# Altium PCB demo_board.PcbDoc (part 2 of 2)
Units mm, origin at the board's own origin, x right, y up, seen from the top; angles counter-clockwise.
Board outline 152.4 x 101.6 mm, 4 copper layers (L1, L2, L3, L4), stack 1.641 mm thick; 94 components, 72 nets, 715 pads, 204 vias.
Unrouted connection lines stored in the file: 201.
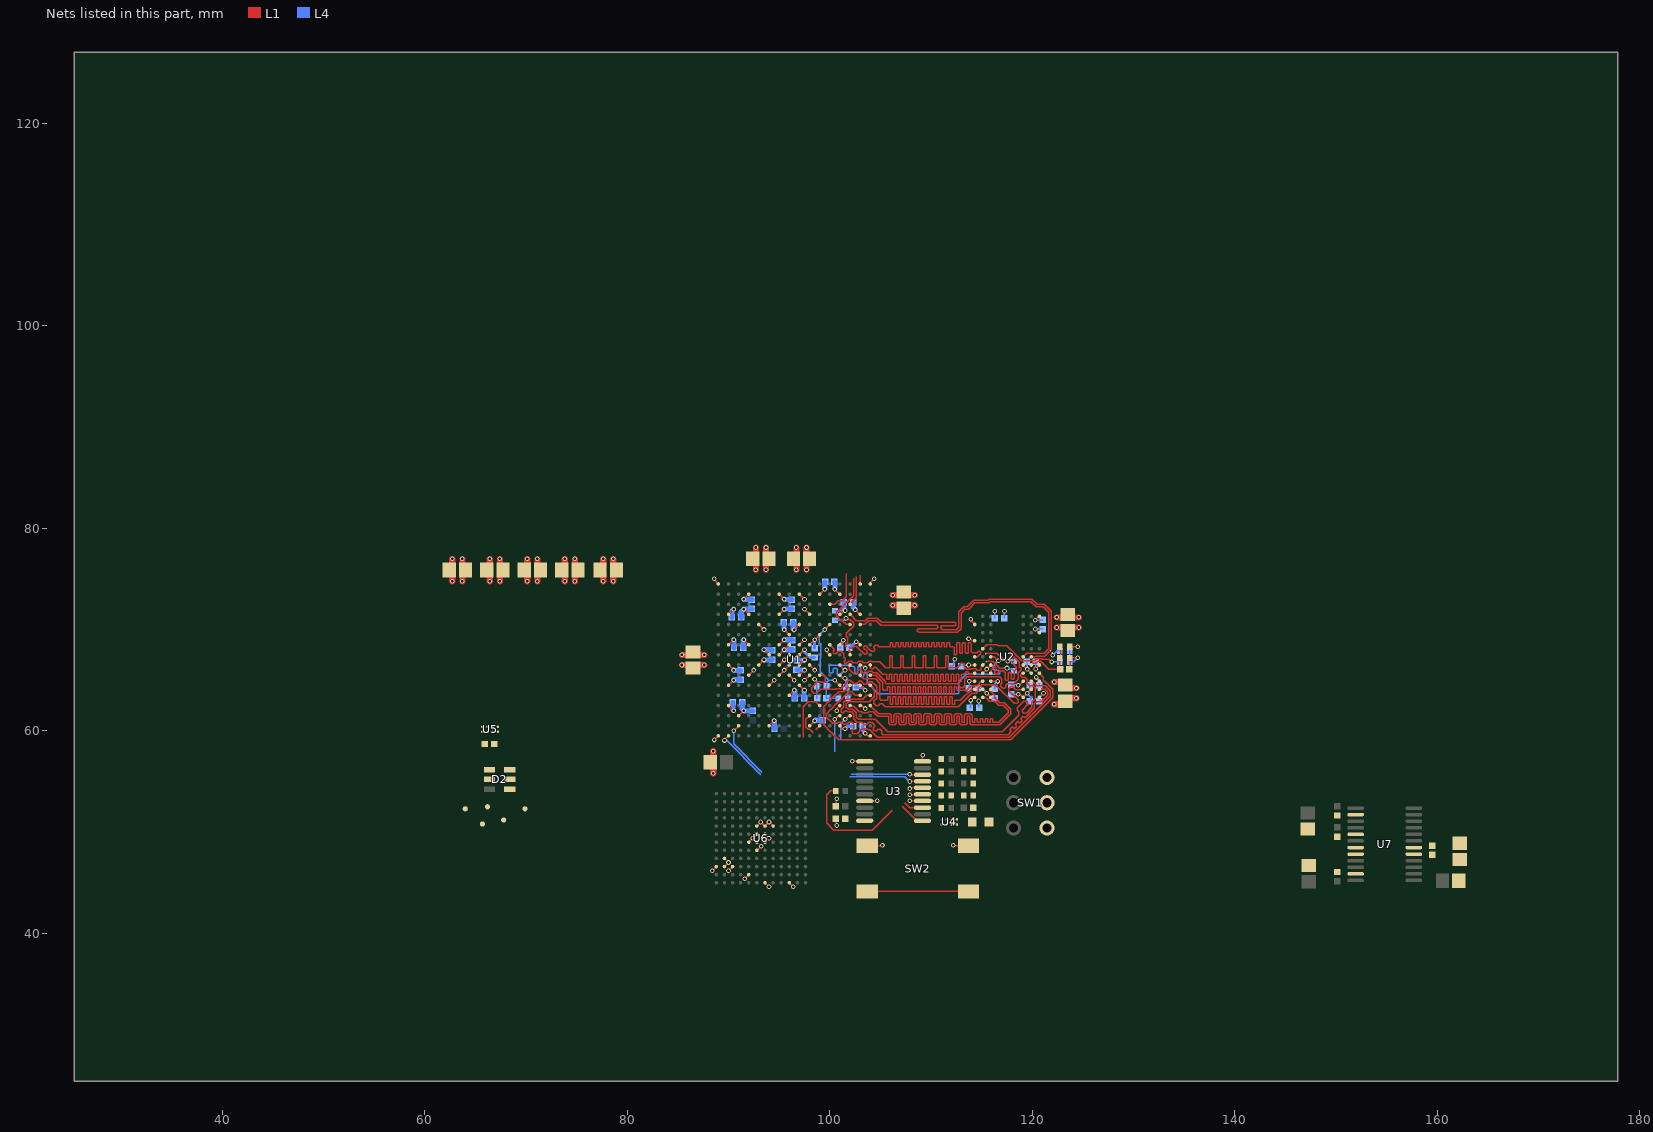
[diagram p4: the nets of this part, all layers, seen from the top]

## Via types
v1: diameter 0.457, hole 0.254, L1 to L4, 204 vias

## Nets (pads, with @x,y where several pads share a name; then routed paths per layer and width w, separated by ;. In a path a pad name is that pad's centre, name@x,y a point inside that pad or via, vN(x,y) a via of type N, cw(c..) or ccw(c..) an arc to the next point about the centre after c; other vN are vias at no path point) (continued)
CK_P: NT1.2 U1.G12 U2.E8 | length 32.6
  L1 w0.127: U1.G12@100,68.5 100.437,68.062 100.437,67.937 100.325,67.825 100.325,67.7 100.4,67.625 100.585,67.625 100.825,67.865 101.151,67.865 101.366,67.651 101.366,67.258 101.525,67.099 101.525,66.95 101.422,66.847 101.422,66.726 101.498,66.65 101.633,66.65 101.849,66.865 102.151,66.865 102.271,66.746 102.729,66.746 102.849,66.865 103.151,66.865 103.263,66.754 103.305,66.754 103.313,66.746 103.729,66.746 103.849,66.865 104.151,66.865 104.19,66.827 104.922,66.827 105.507,66.242 105.905,66.242 105.929,66.266 105.929,67.4 ; 105.929,67.405 106.175,67.405 106.175,66.271 106.204,66.242 107,66.242 ; 107.005,66.242 107.029,66.266 107.029,67.4 ; 107.029,67.405 107.275,67.405 107.275,66.271 107.304,66.242 108.1,66.242 108.129,66.271 108.129,67.405 ; 108.129,67.41 108.375,67.41 108.375,66.277 108.409,66.242 109.195,66.242 109.229,66.277 109.229,67.41 ; 109.229,67.416 109.475,67.416 109.475,66.282 109.514,66.242 110.29,66.242 110.329,66.282 110.329,67.416 ; 110.329,67.421 110.575,67.421 110.575,66.325 110.658,66.242 111.384,66.242 111.429,66.287 111.429,67.421 ; 111.429,67.426 111.675,67.426 111.675,66.292 111.725,66.242 112.58,66.242 112.854,66.516 112.854,66.55 112.969,66.665 113.141,66.665 113.281,66.525 113.281,66.326 113.526,66.081 113.906,66.081 113.955,66.13 114.394,66.13 114.549,65.975 114.851,65.975 114.947,66.071 114.947,66.347 U2.E8@115.1,66.5 115.116,66.5 NT1.2@115.252,66.636
CKE: NT4.2 U1.D14 U2.F2 | length 32.5
  L1 w0.127: U1.D14@102,71.5 102.625,70.875 103.481,70.875 103.725,71.119 104.692,71.119 105.111,70.7 112.325,70.7 112.425,70.6 112.425,70.45 112.35,70.375 111.075,70.375 110.95,70.25 110.95,70.125 111.109,69.966 112.48,69.966 112.719,70.205 112.719,71.737 113.244,72.262 113.592,72.262 114.211,72.881 115.609,72.881 115.734,73.006 119.964,73.006 120.48,72.49 121.185,72.49 121.85,71.825 121.85,67.991 121.205,67.346 121.096,67.346 121.064,67.379 120.336,67.379 120.258,67.3 U2.F2@119.9,67.3
CS: R7.1 U2.G8 | length 8.7
  L1 w0.127: U2.G8@115.1,68.1 115.5,68.5 115.519,68.481 116.519,68.481 116.6,68.4 117.484,68.4 118.729,67.155 118.729,67.147 118.947,66.93 120.246,66.93 120.441,67.125 120.959,67.125 120.991,67.092 121.608,67.092 v1(121.9,66.8)
  L4 w0.127: v1(121.9,66.8) R7.1@122.725,66.8
DM/RDQS: U1.K11 U2.B3 | length 32.5
  L1 w0.127: U1.K11@99,65.5 99.4,65.5 99.55,65.35 99.55,64.85 99.5,64.8 99.217,64.8 99.151,64.865 98.849,64.865 98.669,64.686 98.635,64.686 98.366,64.417 98.366,64.349 98.2,64.183 98.2,63.9 98.4,63.7 98.683,63.7 99.083,64.1 100.6,64.1 100.634,64.134 101.151,64.134 101.55,64.533 101.55,64.65 101.875,64.975 102.042,64.975 102.392,64.625 102.608,64.625 102.933,64.95 103.067,64.95 103.417,64.6 103.583,64.6 103.849,64.865 104.151,64.865 104.619,64.397 104.619,63.219 104.35,62.95 104.35,62.725 104.575,62.5 104.8,62.5 104.975,62.675 105.2,62.675 105.495,62.38 112.68,62.38 114.03,63.73 114.453,63.73 114.67,63.947 114.67,64.194 115.006,64.53 116.328,64.53 116.44,64.417 116.482,64.417 118.199,62.7 118.475,62.7 118.6,62.825 118.6,63.05 117.675,63.975 117.675,64.175 117.85,64.35 118.075,64.35 118.35,64.075 119.075,64.075 U2.B3@119.1,64.1
DQ0: U1.L14 U2.D1 | length 33.3
  L1 w0.127: U1.L14@102,64.5 101.38,63.88 100.864,63.88 100.366,63.382 100.366,63.349 99.882,62.866 99.849,62.866 99.381,62.397 99.381,60.603 100.118,59.866 100.151,59.866 100.366,59.651 100.366,59.618 100.866,59.117 117.871,59.117 122.027,63.273 122.027,64.084 121.484,64.627 121.473,64.627 121.1,65 121.1,65.3 U2.D1@120.7,65.7
DQ1: U1.L16 U2.D3 | length 32.8
  L1 w0.127: U1.L16@104,64.5 104.079,64.421 104.046,64.388 104.365,64.069 104.365,63.349 103.882,62.866 101.849,62.866 101.634,62.651 101.634,62.349 101.864,62.12 102.257,62.12 102.276,62.1 102.3,62.1 102.634,61.766 102.634,61.349 102.864,61.12 104.48,61.12 105.7,59.9 117.024,59.9 118.65,61.526 118.65,61.9 118.525,62.025 118.525,62.275 119.175,62.925 119.425,62.925 119.55,62.8 119.55,62.6 119,62.05 119,61.876 119.134,61.742 119.383,61.742 119.95,62.309 119.95,62.826 120.27,63.147 120.27,64.253 120.053,64.471 119.729,64.471 119.5,64.7 119.5,65.024 119.249,65.275 118.975,65.275 118.85,65.4 118.85,65.55 119,65.7 U2.D3@119.1,65.7
DQ2: U1.M15 U2.C2 | length 33.6
  L1 w0.127: U1.M15@103,63.5 102.517,63.5 102.151,63.866 101.849,63.866 101.366,63.382 101.366,63.349 100.882,62.866 100.849,62.866 100.366,62.382 100.366,62.349 100.151,62.135 100.118,62.135 99.635,61.651 99.635,61.349 99.849,61.135 99.882,61.135 100.283,60.734 100.717,60.734 100.849,60.866 101.151,60.866 101.367,60.65 101.633,60.65 101.849,60.866 102.151,60.866 102.366,60.651 102.366,60.24 102.2,60.075 102.2,59.817 102.308,59.708 102.692,59.708 103.118,60.135 103.244,60.135 103.306,60.197 103.654,60.197 103.731,60.12 103.921,60.12 104.67,59.371 117.73,59.371 121.773,63.414 121.773,63.979 121.379,64.373 121.368,64.373 121.27,64.471 120.413,64.471 119.983,64.9 U2.C2@119.9,64.9
DQ3: U1.M16 U2.B1 | length 31.4
  L1 w0.127: U1.M16@104,63.5 103.625,63.5 103.245,63.12 101.62,63.12 101.366,62.866 101.366,62.349 101.125,62.108 101.125,61.892 101.242,61.775 101.35,61.775 101.55,61.975 101.649,61.975 101.758,61.866 102.151,61.866 102.366,61.651 102.366,61.175 102.675,60.866 103.151,60.866 103.417,60.6 103.583,60.6 103.849,60.866 104.151,60.866 104.45,60.567 104.45,60.433 104.3,60.283 104.3,60.1 104.4,60 104.625,60 104.8,60.175 104.977,60.175 105.125,60.027 105.125,59.75 105.25,59.625 117.625,59.625 117.935,59.935 117.755,60.114 118.025,60.384 118.204,60.204 118.474,60.474 118.294,60.653 118.563,60.923 118.743,60.743 119.012,61.012 118.833,61.192 119.102,61.461 119.282,61.282 120.213,62.212 120.213,62.653 120.422,62.862 120.862,62.862 121.519,63.519 121.519,63.874 121.274,64.119 120.719,64.119 U2.B1@120.7,64.1
DQ4: U1.J14 U2.D7 | length 32.5
  L1 w0.127: U1.J14@102,66.5 101.919,66.419 101.919,66.1 102.221,65.798 102.221,65.796 102.367,65.65 102.6,65.65 102.7,65.75 102.7,65.952 102.773,66.025 103.025,66.025 103.425,65.625 103.608,65.625 103.858,65.875 104.142,65.875 104.263,65.754 104.624,65.754 105.462,64.916 105.462,64.713 105.55,64.625 105.553,64.628 111.475,64.628 112.64,64.628 112.8,64.468 112.8,64.379 112.925,64.254 113.129,64.254 113.35,64.475 113.35,65.143 113.401,65.194 113.537,65.33 116.77,65.33 116.994,65.106 116.994,64.701 116.879,64.586 116.879,64.379 117.058,64.2 117.25,64.2 117.375,64.325 117.375,64.525 117.5,64.65 118.146,64.65 118.596,65.1 118.596,65.72 118.9,66.024 118.9,66.176 118.729,66.347 118.729,66.771 118.025,67.475 117.9,67.475 117.825,67.4 117.825,67.275 118,67.1 118,66.7 118.4,66.3 118.4,66.063 118.237,65.9 118.237,65.187 118.125,65.075 118.025,65.075 117.925,65.175 117.925,65.675 117.825,65.775 117.7,65.775 117.625,65.7 117.625,65.05 117.55,64.975 117.375,64.975 117.325,65.025 117.325,65.75 117.129,65.946 116.8,65.946 116.65,65.796 116.65,65.675 116.575,65.6 116.4,65.6 116.3,65.7 116.3,65.9 116.391,65.991 116.391,66.216 116.332,66.276 116.199,66.276 115.919,65.995 115.919,65.7 U2.D7@115.9,65.7
DQ5: U1.J16 U2.D9 | length 32.5
  L1 w0.127: U1.J16@104,66.5 104,66.229 104.1,66.129 104.247,66.129 104.418,66.3 104.551,66.3 105.243,65.607 105.624,65.607 105.624,65.112 105.878,65.112 105.878,65.607 106.132,65.607 106.132,64.882 106.386,64.882 106.386,65.607 106.64,65.607 106.64,64.882 106.894,64.882 106.894,65.607 107.148,65.607 107.148,64.882 107.402,64.882 107.402,65.607 107.656,65.607 107.656,64.882 107.91,64.882 107.91,65.607 108.164,65.607 108.164,64.882 108.418,64.882 108.418,65.607 108.672,65.607 108.672,64.882 108.926,64.882 108.926,65.607 109.18,65.607 109.18,64.882 109.434,64.882 109.434,65.607 109.688,65.607 109.688,64.882 109.942,64.882 109.942,65.607 110.196,65.607 110.196,64.882 110.45,64.882 110.45,65.607 110.704,65.607 110.704,64.882 110.958,64.882 110.958,65.607 111.212,65.607 111.212,64.882 111.466,64.882 111.466,65.607 111.72,65.607 111.72,64.882 111.974,64.882 111.974,65.607 112.228,65.607 112.228,64.882 112.482,64.882 112.482,65.607 112.736,65.607 112.736,64.863 112.99,64.863 112.99,65.607 113.257,65.607 113.476,65.827 113.598,65.827 113.818,65.607 114.207,65.607 U2.D9@114.3,65.7
DQ6: U1.K15 U2.B9 | length 32.6
  L1 w0.127: U1.K15@103,65.5 103.365,65.134 104.525,65.134 104.954,64.705 104.954,63.146 105.1,63 105.595,63 105.6,63.005 105.727,63.005 105.727,63.369 105.981,63.369 105.981,62.643 106.235,62.643 106.235,63.369 106.489,63.369 106.489,62.643 106.743,62.643 106.743,63.369 106.997,63.369 106.997,62.643 107.251,62.643 107.251,63.369 107.505,63.369 107.505,62.643 107.759,62.643 107.759,63.369 108.013,63.369 108.013,62.643 108.267,62.643 108.267,63.369 108.521,63.369 108.521,62.643 108.775,62.643 108.775,63.369 109.029,63.369 109.029,62.643 109.283,62.643 109.283,63.369 109.537,63.369 109.537,62.643 109.791,62.643 109.791,63.369 110.045,63.369 110.045,62.643 110.299,62.643 110.299,63.369 110.553,63.369 110.553,62.643 110.807,62.643 110.807,63.369 111.061,63.369 111.061,62.643 111.315,62.643 111.315,63.369 111.569,63.369 111.569,62.643 111.823,62.643 111.823,63.369 112.077,63.369 112.077,62.643 112.331,62.643 112.331,63.005 112.905,63.005 114.019,64.119 114.281,64.119 U2.B9@114.3,64.1
DQ7: U1.K16 U2.C8 | length 32.6
  L1 w0.127: U1.K16@104,65.5 104.518,65.5 105.208,64.81 105.208,64.117 105.325,64 105.677,64 105.677,64.374 105.931,64.374 105.931,63.63 106.185,63.63 106.185,64.374 106.439,64.374 106.439,63.63 106.693,63.63 106.693,64.374 106.947,64.374 106.947,63.63 107.201,63.63 107.201,64.374 107.455,64.374 107.455,63.63 107.709,63.63 107.709,64.374 107.963,64.374 107.963,63.63 108.217,63.63 108.217,64.374 108.471,64.374 108.471,63.63 108.725,63.63 108.725,64.374 108.979,64.374 108.979,63.63 109.233,63.63 109.233,64.374 109.487,64.374 109.487,63.63 109.741,63.63 109.741,64.374 109.995,64.374 109.995,63.63 110.249,63.63 110.249,64.374 110.503,64.374 110.503,63.63 110.757,63.63 110.757,64.374 111.011,64.374 111.011,63.63 111.265,63.63 111.265,64.374 111.519,64.374 111.519,63.63 111.773,63.63 111.773,64.374 112.027,64.374 112.027,63.63 112.281,63.63 112.281,64.374 112.535,64.374 112.535,64 113.541,64 114.011,64.471 114.541,64.471 114.97,64.9 U2.C8@115.1,64.9
DQS_N: U1.N16 U2.A8 | length 32.6
  L1 w0.127: U1.N16@104,62.5 104.817,61.683 105.905,61.683 106.054,61.534 106.054,60.872 106.3,60.872 106.3,61.534 106.449,61.683 106.905,61.683 107.054,61.534 107.054,60.872 107.3,60.872 107.3,61.534 107.449,61.683 107.905,61.683 108.054,61.534 108.054,60.872 108.3,60.872 108.3,61.534 108.449,61.683 108.905,61.683 109.054,61.534 109.054,60.872 109.3,60.872 109.3,61.534 109.449,61.683 109.905,61.683 110.054,61.534 110.054,60.872 110.3,60.872 110.3,61.534 110.449,61.683 110.905,61.683 111.054,61.534 111.054,60.872 111.3,60.872 111.3,61.534 111.449,61.683 111.905,61.683 112.054,61.534 112.054,60.872 112.3,60.872 112.3,61.534 112.449,61.683 112.905,61.683 113.054,61.534 113.054,60.872 113.3,60.872 113.3,61.534 113.449,61.683 113.905,61.683 114.054,61.534 114.054,60.872 114.327,60.872 114.327,61.209 114.581,61.209 114.581,60.872 114.835,60.872 114.835,61.209 115.089,61.209 115.089,60.872 115.343,60.872 115.343,61.209 115.597,61.209 115.597,60.872 115.851,60.872 115.851,61.209 116.105,61.209 116.105,60.872 116.663,60.872 117.6,61.808 117.6,62.041 117.111,62.53 116.67,62.53 116.27,62.93 115.747,62.93 115.529,63.147 115.529,63.171 115.419,63.281 115.326,63.281 115.307,63.3 U2.A8@115.1,63.3
DQS_P: U1.N14 U2.B7 | length 32.6
  L1 w0.127: U1.N14@102,62.5 102.238,62.5 102.384,62.354 102.405,62.354 102.888,61.871 102.888,61.866 103.151,61.866 103.236,61.781 103.764,61.781 103.849,61.866 104.275,61.866 104.712,61.429 105.8,61.429 105.8,60.766 105.949,60.618 106.405,60.618 106.554,60.766 106.554,61.429 106.8,61.429 106.8,60.766 106.949,60.618 107.405,60.618 107.554,60.766 107.554,61.429 107.8,61.429 107.8,60.766 107.949,60.618 108.405,60.618 108.554,60.766 108.554,61.429 108.8,61.429 108.8,60.766 108.949,60.618 109.405,60.618 109.554,60.766 109.554,61.429 109.8,61.429 109.8,60.766 109.949,60.618 110.405,60.618 110.554,60.766 110.554,61.429 110.8,61.429 110.8,60.766 110.949,60.618 111.405,60.618 111.554,60.766 111.554,61.429 111.8,61.429 111.8,60.766 111.949,60.618 112.405,60.618 112.554,60.766 112.554,61.429 112.8,61.429 112.8,60.766 112.949,60.618 113.405,60.618 113.554,60.766 113.554,61.429 113.8,61.429 113.8,60.766 113.949,60.618 116.768,60.618 117.854,61.703 117.854,62.146 117.216,62.784 116.775,62.784 116.5,63.059 116.5,63.07 116.27,63.3 116.27,63.53 115.9,63.9 U2.B7@115.9,64.1
FPGA_CCLK: R15.2 R16.1 U1.R11 U3.3 U4.C1 | length 2.5
  L1 w0.127: 98.62,60.12 U1.R11@99,60.5 ; 107.42,52.913 107.907,52.425 U3.3@109.15,52.425
FPGA_DIN: U1.P10 U3.1 U4.C2 | length 4.8
  L1 w0.127: U1.P10@98,61.5 97.635,61.135 97.635,60.349 97.849,60.135 98.04,60.135 98.366,59.809 ; 107.166,52.547 108.587,51.125 U3.1@109.15,51.125
FPGA_DONE: D1.1 R13.2 U1.P13 U3.10 | length 4.7
  L1 w0.127: v1(100.505,61.153) 100.852,61.5 U1.P13@101,61.5 ; U3.10@109.15,56.975 109.15,57.575 v1(109.175,57.6)
  L4 w0.127: 100.505,57.93 v1(100.505,61.153) ; v1(109.175,57.6) v1@109.305,57.73
FPGA_INIT_B: R11.2 U1.R3 U3.8 | length 13.8
  L1 w0.127: v1(90.525,60) 91,60.475 U1.R3@91,60.5 ; v1@107.85,55.725 107.9,55.675 U3.8@109.15,55.675 U3.8@109.95,55.675
  L4 w0.127: v1(90.525,60) 90.525,58.7 93.3,55.925 ; 102.1,55.725 v1@107.85,55.725
  other v1: 107.9,55.7
FPGA_M1: R9.2 SW1.NC1 U1.N11 | length 16.4
  L1 w0.127: 97.366,59.349 97.366,62.382 97.849,62.866 98.635,62.866 U1.N11@99,62.5 ; R9.2@100.575,54.05 100.525,54.1 100.1,54.1 99.7,53.7 99.7,50.9 100.394,50.206 100.886,50.206 104.206,50.206 106.166,52.166
FPGA_PROG_B: R12.2 SW2.2 U1.T2 U3.7 | length 23.5
  L1 w0.127: v1(89.6,59.05) 89.6,59.1 U1.T2@90,59.5 ; SW2.2@103.7,44.15 SW2.2@113.7,44.15 ; v1@107.825,55.025 U3.7@109.15,55.025 U3.7@109.713,55.025
  L4 w0.127: v1(89.6,59.05) 89.816,59.05 93.195,55.671 ; 101.995,55.471 107.379,55.471 v1@107.825,55.025
  other v1: 107.9,55
FPGA_SUSPEND: R14.1 U1.P14 | length 2.8
  L1 w0.127: v1(101.505,61.128) 101.877,61.5 U1.P14@102,61.5
  L4 w0.127: 101.081,59.144 101.081,60.704 v1(101.505,61.128)
GND: C1.1 C2.1 C3.1 C4.1 C5.1 C6.1 C7.1 C8.1 C9.1 C10.1 C11.1 C12.1 C13.1 C14.1 C15.1 C16.1 C17.1 C18.1 C19.1 C20.1 C21.1 C22.1 C23.1 C24.1 C25.1 C26.1 C27.1 C28.1 C29.1 C30.1 C31.1 C32.1 C33.1 C34.1 C35.1 C36.1 C37.1 C38.1 C39.1 C40.1 C41.1 C42.1 C43.1 C44.1 C45.1 C46.1 C47.1 C48.1 C49.1 C50.1 C51.1 C52.1 C53.1 C54.1 C55.1 D2.2 R3.2 R5.2 R6.2 R7.2 R8.2 R10.2 R14.2 R18.2 SW1.COM1 SW2.1 TP5.1 U1.A1 U1.A16 U1.B7 U1.B11 U1.D4 U1.D13 U1.E9 U1.G2 U1.G8 U1.G15 U1.H7 U1.H9 U1.H12 U1.J5 U1.J8 U1.K7 U1.K9 U1.L2 U1.L15 U1.M8 U1.N13 U1.P3 U1.R6 U1.R10 U1.T1 U1.T16 U2.A3 U2.A7 U2.B2 U2.B8 U2.D2 U2.D8 U2.E3 U2.E7 U2.J1 U2.K9 U3.11 U4.D1 U5.A1 U5.B2 U5.D1 U6.F6 U6.F7 U6.G5 U6.G6 U6.G7 U6.J2 U6.K2 U6.L5 U6.M10 U7.2 U7.5 U7.7 U7.8 U7.11 U7.17 | length 96.7
  L1 w0.127: v1(88.6,59.1) U1.T1@89,59.5 ; v1(88.6,75) 88.6,74.9 U1.A1@89,74.5 ; U6.K2@89.6,46.6 v1(90,47) U6.J2@89.6,47.4 ; U1.L2@90,64.5 v1(90.5,65) ; U1.G2@90,68.5 v1(90.5,69) ; U1.P3@91,61.5 v1(91.5,62) ; v1(91.5,72) U1.D4@92,71.5 ; v1(91.6,45.4) U6.L5@92,45.8 ; U6.G5@92,49 v1(92.4,49.4) ; U6.G6@92.8,49 v1(92.4,49.4) ; U6.F6@92.8,49.8 v1(92.4,49.4) ; U1.J5@93,66.5 v1(93.5,67) ; U6.G7@93.6,49 v1(94,49.4) U6.F7@93.6,49.8 ; U1.R6@94,60.5 v1(94.5,61) ; U1.K7@95,65.5 v1(95.5,66) ; U1.H7@95,67.5 v1(95.5,68) U1.G8@96,68.5 ; U1.B7@95,73.5 v1(95.5,73) ; v1(95.5,66) U1.J8@96,66.5 ; U6.M10@96,45 v1(96.4,44.6) ; U1.M8@96,63.5 v1(96.5,64) ; v1(96.469,69.977) 96.477,69.977 U1.E9@97,70.5 ; U1.K9@97,65.5 v1(97.5,66) ; U1.H9@97,67.5 v1(97.5,68) ; U1.R10@98,60.5 v1(98.5,61) ; U1.B11@99,73.5 v1(99.5,74) ; v1(99.7,68) 99.7,67.8 U1.H12@100,67.5 ; C45.1@100.59,52.55 100.65,52.61 v1@100.65,53.175 ; C47.1@100.64,51.3 100.64,50.685 v1(100.675,50.65) ; v1(100.7,62) 100.6,62.1 U1.N13@101,62.5 ; U1.D13@101,71.5 101.1,71.5 101.5,71.9 101.505,71.895 v1(101.505,71.879) ; v1(102.225,57) 102.25,56.975 U3.11@103.45,56.975 ; v1(102.595,68.795) 102.595,68.896 102.6,68.9 U1.G15@103,68.5 ; U1.L15@103,64.5 v1(103.5,64) ; v1(103.48,59.778) 103.758,59.5 U1.T16@104,59.5 ; SW2.1@103.7,48.65 105.15,48.65 v1(105.2,48.7) ; U1.A16@104,74.5 104,74.6 v1(104.4,75) ; v1(112.2,48.7) 112.25,48.65 SW2.1@113.7,48.65 ; v1(113.9,71) 113.9,70.9 U2.K9@114.3,70.5 ; U2.B8@115.1,64.1 v1(115.5,63.7) U2.A7@115.9,63.3 ; U2.D8@115.1,65.7 v1(115.5,66.1) U2.E7@115.9,66.5 ; v1@118.625,63.575 118.825,63.575 U2.A3@119.1,63.3 v1(119.5,63.7) U2.B2@119.9,64.1 ; U2.E3@119.1,66.5 v1(119.5,66.1) U2.D2@119.9,65.7 ; v1(120.3,70.057) 120.343,70.057 U2.J1@120.7,69.7 ; C43.1@123.76,66.1 123.76,67.185 123.775,67.2 v1(124.5,67.2)
  L1 w0.61: v1(62.725,74.775) 62.725,75.575 C26.1@62.425,75.875 62.725,76.175 v1(62.725,76.975) ; v1(66.425,74.775) 66.425,75.575 C25.1@66.125,75.875 66.425,76.175 v1(66.425,76.975) ; v1(70.125,74.775) 70.125,75.575 C27.1@69.825,75.875 70.125,76.175 v1(70.125,76.975) ; v1(73.825,74.775) 73.825,75.575 C28.1@73.525,75.875 73.825,76.175 v1(73.825,76.975) ; v1(77.625,74.775) 77.625,75.575 C29.1@77.325,75.875 77.625,76.175 v1(77.625,76.975) ; v1(85.4,66.5) 86.2,66.5 C18.1@86.5,66.2 86.8,66.5 v1(87.6,66.5) ; v1(88.5,55.8) 88.5,56.6 C16.1@88.2,56.9 88.5,57.2 v1(88.5,58) ; v1(92.7,75.9) 92.7,76.7 C23.1@92.4,77 92.7,77.3 v1(92.7,78.1) ; v1(96.7,75.9) 96.7,76.7 C14.1@96.4,77 96.7,77.3 v1(96.7,78.1) ; v1(106.2,73.4) 107,73.4 C11.1@107.3,73.7 107.6,73.4 v1(108.4,73.4) ; v1(122.154,62.622) C42.1@122.926,62.622 ; v1(122.4,71.2) 123.229,71.2 C41.1@123.468,71.439 ; C42.1@123.254,62.922 123.554,63.222 v1(124.354,63.222) ; C41.1@123.5,71.5 123.8,71.2 v1(124.6,71.2)
  L4 w0.127: C31.1@96.469,70.64 C31.1@96.469,70.909 ; C32.1@96.54,63.3 C32.1@96.64,63.2 ; v1(98.495,65.105) 98.725,64.875 R5.2@98.725,64.4 98.725,63.215 C44.1@98.74,63.2 ; R6.2@100.5,71.875 101.255,71.875 v1@101.39,72.01 ; C33.1@101.76,68.2 102,68.2 C33.1@102.024,68.224 ; C1.1@111.865,66.375 112.07,66.375 112.217,66.523 112.217,66.878 112.355,67.016 v1(112.355,67.053) ; C9.1@114.66,64.2 115,64.2 v1(115.5,63.7) 115.985,63.215 C8.1@116.275,63.215 ; v1(114.7,62.943) 114.7,62.36 C10.1@114.76,62.3 ; C5.1@117.21,71.1 117.21,71.76 v1(117.25,71.8) ; C7.1@117.9,63.615 118.615,63.615 v1(118.625,63.625) ; C2.1@119.44,66.8 119.5,66.74 v1(119.5,66.1) ; C6.1@119.74,64.5 119.74,63.94 v1(119.5,63.7) 119.865,63.335 C3.1@119.865,63 ; v1(120.3,70.057) 121.033,70.057 C4.1@121.05,70.04 ; R8.2@123.675,67.9 R7.2@123.675,66.8 124.1,66.8 v1(124.5,67.2)
  L4 w0.305: v1(97.5,68) 97.5,67.8 98.06,67.24 C21.1@98.5,67.24 ; C33.1@101.933,68.224 102.024,68.224 v1(102.595,68.795) ; C34.1@102.56,64.3 103.2,64.3 v1(103.5,64) ; C12.1@103.254,60.452 103.254,60.004 v1(103.48,59.778)
  L4 w0.508: v1(90.5,65) 90.54,65.04 C20.1@91.2,65.04 ; v1(90.5,69) 90.54,68.96 C37.1@90.54,68.2 ; C38.1@91.26,71.2 91.26,71.76 v1(91.5,72) 91.54,72.04 C35.1@92.3,72.04 ; C19.1@91.36,62.8 91.36,62.14 v1(91.5,62) 91.54,61.96 C17.1@92.4,61.96 ; v1(93.5,67) 94.26,67 C22.1@94.3,67.04 ; v1(94.5,61) 94.54,60.96 C36.1@94.54,60.2 ; v1(95.5,68) 96.26,68 C30.1@96.3,68.04 ; v1(95.5,73) 95.548,72.952 C39.1@96.241,72.952 ; C31.1@96.396,70.714 96.396,70.05 v1(96.469,69.977) ; v1(96.5,64) 96.54,63.96 96.54,63.3 C32.1@96.54,63.2 ; C24.1@96.76,66 v1(97.5,66) ; v1(98.5,61) 98.54,61.04 C40.1@99.3,61.04 ; v1(99.5,74) 99.5,74.66 C15.1@99.54,74.7 ; v1@101.39,72.01 C13.1@101.39,72.7
  other v1: 100.7,53.3
MVDD: C1.2 C2.2 C3.2 C4.2 C5.2 C6.2 C7.2 C8.2 C9.2 C10.2 C11.2 C12.2 C13.2 C33.2 C34.2 C41.2 C42.2 R2.1 R4.1 U1.D15 U1.G13 U1.J15 U1.K13 U1.N15 U1.R13 U2.A1 U2.A9 U2.C1 U2.C3 U2.C7 U2.C9 U2.E1 U2.E9 U2.H9 U2.L1 | length 31
  L1 w0.127: U1.G13@100.975,68.5 v1@101.375,68.9 ; U1.R13@101,60.5 101.3,60.2 v1(101.5,60.2) ; U1.K13@101,65.5 101.3,65.2 v1(101.5,65.2) ; U1.G13@101,68.5 U1.G13@101.1,68.5 ; v1(101.33,68.953) v1@101.447,68.953 ; v1(102.5,71.975) 102.975,71.5 U1.D15@103,71.5 ; U1.N15@103,62.5 103.2,62.5 v1(103.5,62.2) ; U1.J15@103,66.5 103.2,66.5 v1(103.5,66.2) ; v1(113.7,66.5) U2.E9@114.3,66.5 ; v1(113.7,69.1) 113.859,69.1 114.059,68.9 U2.H9@114.3,68.9 ; v1(113.775,64.9) U2.C9@114.3,64.9 ; v1(113.9,63) 114.2,63.3 U2.A9@114.3,63.3 ; U2.C7@115.9,64.9 116.55,64.9 v1(116.575,64.875) ; v1(118.6,64.5) 118.7,64.5 U2.C3@119.1,64.9 U2.C3@119.182,64.982 ; v1(120.281,70.903) 120.303,70.903 U2.L1@120.7,71.3 ; v1(120.331,66.103) 120.331,66.131 U2.E1@120.7,66.5 ; v1(120.371,65.271) 120.371,65.229 U2.C1@120.7,64.9 ; U2.A1@120.7,63.3 v1(121.1,63.7) ; R2.1@123.775,68.3 v1(124.5,68.3)
  L1 w0.61: v1(106.2,72.4) 107,72.4 C11.2@107.3,72.1 107.6,72.4 v1(108.4,72.4) ; v1(122.154,64.822) C42.2@123.02,64.822 ; v1(122.4,70.2) C41.2@123.207,70.2 ; C42.2@123.02,64.222 C42.2@123.273,64.475 ; C41.2@123.207,70.1 C41.2@123.468,69.839 ; C42.2@123.254,64.522 123.554,64.222 v1(124.354,64.222) ; C41.2@123.5,69.9 123.8,70.2 v1(124.6,70.2)
  L4 w0.127: C33.2@100.84,68.2 C33.2@100.84,68.224 ; C34.2@101.64,64.3 101.775,64.165 R4.1@101.775,63.2 ; v1@102.485,71.99 v1(102.5,71.975) ; v1@103.45,62.15 v1(103.5,62.2) ; C1.2@112.785,66.375 112.907,66.497 113.697,66.497 v1(113.7,66.5) ; C9.2@113.74,64.2 113.7,64.24 113.775,64.315 v1(113.775,64.9) ; C10.2@113.84,62.3 113.9,62.36 v1(113.9,63) ; C8.2@116.275,64.135 116.275,64.65 116.5,64.875 v1(116.575,64.875) ; C5.2@116.29,71.1 116.29,71.815 v1(116.3,71.825) ; C7.2@117.9,64.535 118.565,64.535 v1(118.6,64.5) ; v1(120.281,70.903) 120.993,70.903 C4.2@121.05,70.96 ; v1(120.331,66.103) 120.331,66.771 C2.2@120.36,66.8 ; v1(120.371,65.271) 120.66,64.983 C6.2@120.66,64.5 ; C3.2@120.785,63 120.785,63.385 v1(121.1,63.7)
  L4 w0.305: C33.2@101.013,68.224 101.013,68.513 101.428,68.928 101.403,68.953 v1(101.33,68.953) ; v1(101.5,60.2) 101.752,60.452 C12.2@102.334,60.452 ; v1(101.5,65.2) 101.64,65.06 C34.2@101.64,64.3
  L4 w0.508: C13.2@102.31,72.7 102.31,72.165 v1@102.485,71.99
MVREF: C43.2 R2.2 R3.1 U2.E2 | length 5.6
  L1 w0.127: U2.E2@119.9,66.5 120.075,66.676 120.352,66.676 120.547,66.871 120.853,66.871 121.624,66.1 C43.2@122.74,66.1 122.755,66.115 122.825,66.115 122.725,66.215 R3.1@122.725,67.2 ; R3.1@122.825,67.2 R2.2@122.825,68.3
NetC53_2: C53.2 C54.2 FB1.1 U7.18
NetD1_2: D1.2 R10.1
NetNT1_1: NT1.1 R1.1 | length 3.2
  L1 w0.127: NT1.1@115.431,66.816 115.486,66.871 116.096,66.871 116.767,66.2 v1(117.5,66.2)
  L4 w0.127: v1(117.5,66.2) 117.609,66.091 118.034,66.091 R1.1@118.2,65.925
NetNT2_1: NT2.1 R1.2 | length 3.2
  L1 w0.127: NT2.1@115.39,67.59 115.471,67.671 116.504,67.671 117.306,66.869 v1(117.573,66.869)
  L4 w0.127: v1(117.573,66.869) 117.579,66.875 R1.2@118.2,66.875
NetNT3_1: NT3.1 R6.1 | length 5.2
  L1 w0.127: 101.575,68.475 101.575,68.35 NT3.1@101.66,68.265 ; 101.575,68.519 101.575,68.592 101.754,68.771 101.754,69.197 101.634,69.317 101.634,69.651 101.849,69.865 101.882,69.865 102.366,70.349 102.366,70.651 102.042,70.975 101.525,70.975 101.6,71.05 v1(101.6,71.1)
  L4 w0.127: R6.1@100.5,70.925 101.475,70.925 101.6,71.05 v1(101.6,71.1)
NetNT4_1: NT4.1 R8.1 | length 1.1
  L1 w0.127: NT4.1@121.965,67.71 121.965,67.535 v1(122.025,67.475)
  L4 w0.127: v1(122.025,67.475) 122.45,67.9 R8.1@122.725,67.9
NetR16_2: R16.2 R18.1
NetR17_2: R17.2 SW1.NO1 U4.A1 U4.B2
ODT: NT3.2 U1.H14 U2.F9 | length 32.6
  L1 w0.127: U1.H14@102,67.5 102,67.774 101.85,67.924 101.85,68.075 101.909,68.134 102.151,68.134 102.393,68.376 102.607,68.376 102.769,68.214 103.118,67.865 103.151,67.865 103.442,67.575 103.55,67.575 103.683,67.708 103.683,67.842 103.35,68.175 103.35,68.325 103.45,68.425 103.558,68.425 104.108,67.875 104.375,67.875 104.45,67.95 104.45,68.075 104.325,68.2 104.325,68.308 104.467,68.45 104.725,68.45 104.857,68.318 105.984,68.318 105.984,68.687 106.238,68.687 106.238,68.318 106.492,68.318 106.492,68.687 106.746,68.687 106.746,68.318 107,68.318 107,68.687 107.254,68.687 107.254,68.318 107.508,68.318 107.508,68.687 107.762,68.687 107.762,68.318 108.016,68.318 108.016,68.687 108.27,68.687 108.27,68.318 108.524,68.318 108.524,68.687 108.778,68.687 108.778,68.318 109.032,68.318 109.032,68.687 109.286,68.687 109.286,68.318 109.54,68.318 109.54,68.687 109.794,68.687 109.794,68.318 110.048,68.318 110.048,68.687 110.302,68.687 110.302,68.318 110.556,68.318 110.556,68.687 110.81,68.687 110.81,68.318 111.064,68.318 111.064,68.687 111.318,68.687 111.318,68.318 111.572,68.318 111.572,68.687 111.826,68.687 111.826,68.318 112.207,68.318 112.275,68.25 112.275,67.575 112.325,67.525 112.475,67.525 112.55,67.6 112.55,68.625 112.6,68.675 112.775,68.675 112.825,68.625 112.825,67.7 112.882,67.643 113.025,67.643 113.1,67.718 113.1,68.6 113.175,68.675 113.3,68.675 113.375,68.6 113.375,67.743 113.475,67.643 113.6,67.643 113.675,67.718 113.675,68.625 113.731,68.681 113.919,68.681 113.981,68.619 113.981,67.769 114.05,67.7 114.493,67.7 114.668,67.876 114.801,67.876 114.888,67.788 114.888,67.612 114.576,67.3 U2.F9@114.3,67.3
P_FPGA_CCLK: U4.D2
P_FPGA_DIN: U4.B1
RAS#: U1.J13 U2.F7 | length 29.4
  L1 w0.127: U1.J13@101,66.5 v1(101.5,66) ; U2.F7@115.9,67.3 116.259,67.3 v1(116.656,66.903)
  L4 w0.127: v1(101.5,66) 100.95,65.45 100.8,65.45 100.725,65.525 100.725,66.1 100.625,66.2 100.45,66.2 100.35,66.1 100.35,65.825 100.25,65.725 100.05,65.725 99.925,65.85 99.925,66.425 99.981,66.481 101.76,66.481 101.876,66.365 102.325,66.365 102.45,66.24 102.45,65.719 102.55,65.619 102.673,65.619 102.775,65.721 102.775,66.275 102.865,66.365 102.96,66.365 103.075,66.25 103.075,65.377 103.163,65.288 103.175,65.3 103.3,65.3 103.375,65.375 103.375,65.706 103.45,65.781 103.562,65.781 103.675,65.668 103.675,64.777 104.773,63.679 112.645,63.679 112.746,63.78 112.746,64.823 113.496,65.573 116.673,65.573 116.775,65.675 116.775,65.85 116.625,66 116.275,66 116.1,66.175 116.1,66.347 v1(116.656,66.903)
TCK: TP1.1 U1.C14 U3.6 U5.C2 | length 4.2
  L1 w0.127: U1.C14@102,72.5 102.634,73.134 102.634,75.216 ; v1@107.9,54.375 U3.6@109.15,54.375
  other v1: 107.9,54.3
TCK_IN: D2.6 U5.B1
TDI_0: D2.4 TP3.1 U1.C12 | length 4.2
  L1 w0.127: U1.C12@100,72.5 100.475,72.5 100.625,72.65 100.633,72.65 100.849,72.865 101.215,72.865 101.6,73.25 101.6,75.5
TDI_1: U1.E14 U3.4 | length 7.5
  L1 w0.127: U1.E14@102,70.5 101.607,70.5 101.241,70.865 101.118,70.865 100.635,71.349 100.635,71.651 100.876,71.893 100.91,71.893 101.366,72.349 101.366,72.382 102.118,73.134 102.151,73.134 102.375,73.358 102.375,75.05 ; v1@107.85,53.1 107.85,53.075 U3.4@109.15,53.075
  other v1: 107.9,53.1
TDI_2: U3.17 | length 1.3
  L1 w0.127: U3.17@103.45,53.075 104.675,53.075 v1(104.7,53.1)
TDO: D2.5 TP4.1
TMS: TP2.1 U1.A15 U3.5 U5.C1 | length 2.1
  L1 w0.127: U1.A15@103,74.5 103,75.35 ; v1@107.93,53.678 109.103,53.678 U3.5@109.15,53.725
  other v1: 107.9,53.7
TMS_IN: D2.1 U5.D2
VAUX: C21.2 C22.2 C23.2 C31.2 C32.2 C47.2 C48.2 U1.E5 U1.F8 U1.F11 U1.G10 U1.H6 U1.J10 U1.L6 U1.L9 U3.20 U5.A2 | length 11.5
  L1 w0.127: U1.E5@93,70.5 v1(93.5,70) ; v1(93.5,68) U1.H6@94,67.5 ; U1.L6@94,64.5 v1(94.5,65) ; v1(95.5,70) U1.F8@96,69.5 ; U1.L9@97,64.5 v1(97.5,64) ; U1.J10@98,66.5 v1(98.5,66) ; U1.G10@98,68.5 v1(98.5,69) U1.F11@99,69.5
  L1 w0.61: v1(93.7,75.9) 93.7,76.7 C23.2@94,77 93.7,77.3 v1(93.7,78.1)
  L4 w0.127: C31.2@95.529,70.714 C31.2@95.529,70.889 ; C32.2@97.51,63.25 C32.2@97.56,63.2
  L4 w0.305: C21.2@98.5,68.16 v1(98.5,69)
  L4 w0.508: v1(93.5,68) 94.26,68 C22.2@94.3,67.96 ; C31.2@95.476,70.714 95.476,70.024 v1(95.5,70) ; C32.2@97.46,63.2 97.46,63.96 v1(97.5,64)
VDD0: C14.2 C15.2 C35.2 C39.2 U1.B4 U1.B9 U1.B13 U1.D7 U1.D10 | length 8.3
  L1 w0.127: v1(91.5,73) U1.B4@92,73.5 ; U1.D7@95,71.5 v1(95.5,72) ; U1.B9@97,73.5 v1(97.5,73) ; v1(97.5,72) U1.D10@98,71.5 ; v1(100.5,74) U1.B13@101,73.5
  L1 w0.61: v1(97.7,75.9) 97.7,76.7 C14.2@98,77 97.7,77.3 v1(97.7,78.1)
  L4 w0.508: v1(91.5,73) 91.54,72.96 C35.2@92.3,72.96 ; v1(95.5,72) 95.532,72.032 C39.2@96.241,72.032 ; C15.2@100.46,74.7 100.5,74.66 v1(100.5,74)
VDD3: C18.2 C19.2 C20.2 C37.2 C38.2 U1.D2 U1.G4 U1.J2 U1.K4 U1.N2 | length 9.2
  L1 w0.127: U1.N2@90,62.5 v1(90.5,62) ; U1.J2@90,66.5 v1(90.5,66) ; U1.D2@90,71.5 v1(90.5,72) ; v1(91.5,69) U1.G4@92,68.5 ; U1.K4@92,65.5 v1(92.5,66)
  L1 w0.61: v1(85.4,67.5) 86.2,67.5 C18.2@86.5,67.8 86.8,67.5 v1(87.6,67.5)
  L4 w0.508: C38.2@90.34,71.2 90.34,71.84 v1(90.5,72) ; C19.2@90.44,62.8 90.44,62.06 v1(90.5,62) ; v1(90.5,66) 90.54,65.96 C20.2@91.2,65.96 ; C37.2@91.46,68.2 91.46,68.96 v1(91.5,69)
VDDCORE: U6.E6 U6.E7 U6.E8 U6.H6 U6.K1 U6.K3 U6.M7 | length 4.7
  L1 w0.127: v1@88.3,46.1 U6.K1@88.8,46.6 ; v1(90,46.2) U6.K3@90.4,46.6 ; U6.H6@92.8,48.2 92.85,48.2 v1(93.25,48.6) ; U6.E6@92.8,50.6 v1(93.2,51) U6.E7@93.6,50.6 v1(94,51) U6.E8@94.4,50.6 ; U6.M7@93.6,45 v1(94,44.6)
  other v1: 88.4,46.2
VINT: C24.2 C25.2 C26.2 C27.2 C28.2 C29.2 C30.2 U1.G7 U1.G9 U1.H8 U1.H10 U1.J7 U1.J9 U1.K8 U1.K10 | length 19.5
  L1 w0.127: U1.J7@95,66.5 v1(95.5,67) U1.H8@96,67.5 ; U1.G7@95,68.5 v1(95.5,69) ; U1.K8@96,65.5 v1(96.5,65) ; U1.J9@97,66.5 v1(97.5,67) U1.H10@98,67.5 ; U1.G9@97,68.5 v1(97.5,69) ; v1(97.5,65) U1.K10@98,65.5
  L1 w0.61: v1(63.725,74.775) 63.725,75.575 C26.2@64.025,75.875 63.725,76.175 v1(63.725,76.975) ; v1(67.425,74.775) 67.425,75.575 C25.2@67.725,75.875 67.425,76.175 v1(67.425,76.975) ; v1(71.125,74.775) 71.125,75.575 C27.2@71.425,75.875 71.125,76.175 v1(71.125,76.975) ; v1(74.825,74.775) 74.825,75.575 C28.2@75.125,75.875 74.825,76.175 v1(74.825,76.975) ; v1(78.625,74.775) 78.625,75.575 C29.2@78.925,75.875 78.625,76.175 v1(78.625,76.975)
  L4 w0.508: v1(95.5,69) 96.26,69 C30.2@96.3,68.96 ; C24.2@96.7,66.96 97.46,66.96 v1(97.5,67)
VREF1: C44.2 R4.2 R5.1 U1.E12 U1.L13 | length 10.7
  L1 w0.127: v1(99.5,70) U1.E12@100,70.5 ; v1(100.5,65) U1.L13@101,64.5
  L4 w0.127: v1(99.5,70) 98.981,69.481 98.981,68.719 99.1,68.6 99.1,67.193 99.081,67.174 99.081,65.826 99.8,65.107 99.8,65.1 99.9,65 ; v1(100.5,65) 99.9,65 ; R4.2@100.825,63.2 C44.2@99.66,63.2 99.66,64.385 R5.1@99.675,64.4 99.675,64.775 99.9,65
WE#: U1.E15 U2.F3 | length 32.5
  L1 w0.127: U1.E15@103,70.5 103.475,70.5 103.84,70.865 104.586,70.865 105.024,70.428 110.572,70.428 110.675,70.325 110.675,70.175 110.575,70.075 108.75,70.075 108.625,69.95 108.625,69.85 108.763,69.712 112.585,69.712 112.973,70.1 112.973,71.632 113.349,72.008 113.697,72.008 114.316,72.627 115.715,72.627 115.84,72.752 119.859,72.752 120.375,72.236 121.08,72.236 121.596,71.72 121.596,68.096 121.171,67.671 119.47,67.671 U2.F3@119.1,67.3
pads on no net: D2.3 SW1.COM2 SW1.NC2 SW1.NO2 U1.A2 U1.A3 U1.A4 U1.A5 U1.A6 U1.A7 U1.A8 U1.A9 U1.A10 U1.A11 U1.A12 U1.A13 U1.A14 U1.B1 U1.B2 U1.B3 U1.B5 U1.B6 U1.B8 U1.B10 U1.B12 U1.B14 U1.B16 U1.C1 U1.C2 U1.C3 U1.C4 U1.C5 U1.C6 U1.C7 U1.C8 U1.C9 U1.C10 U1.C11 U1.C13 U1.D1 U1.D3 U1.D5 U1.D6 U1.D8 U1.D9 U1.D11 U1.D12 U1.E1 U1.E2 U1.E3 U1.E4 U1.E6 U1.E7 U1.E8 U1.E10 U1.E11 U1.E13 U1.F1 U1.F2 U1.F3 U1.F4 U1.F5 U1.F6 U1.F7 U1.F9 U1.F10 U1.F12 U1.G1 U1.G3 U1.G5 U1.G6 U1.H1 U1.H2 U1.H3 U1.H4 U1.H5 U1.J1 U1.J3 U1.J4 U1.J6 U1.K1 U1.K2 U1.K3 U1.K5 U1.K6 U1.K12 U1.L1 U1.L3 U1.L4 U1.L5 U1.L7 U1.L8 U1.L10 U1.L11 U1.L12 U1.M1 U1.M2 U1.M3 U1.M4 U1.M5 U1.M6 U1.M7 U1.M9 U1.M10 U1.M11 U1.M12 U1.M13 U1.M14 U1.N1 U1.N3 U1.N4 U1.N5 U1.N6 U1.N8 U1.N9 U1.N12 U1.P1 U1.P2 U1.P4 U1.P5 U1.P6 U1.P7 U1.P8 U1.P9 U1.P11 U1.P12 U1.P15 U1.P16 U1.R1 U1.R2 U1.R5 U1.R7 U1.R9 U1.R12 U1.R14 U1.R15 U1.R16 U1.T3 U1.T4 U1.T5 U1.T6 U1.T7 U1.T8 U1.T9 U1.T10 U1.T12 U1.T13 U1.T14 U1.T15 U2.A2 U2.L3 U2.L7 U3.2 U3.9 U3.12 U3.13 U3.14 U3.15 U3.16 U4.0 U5.0 U6.A1 U6.A2 U6.A3 U6.A4 U6.A5 U6.A6 U6.A7 U6.A8 U6.A9 U6.A10 U6.A11 U6.A12 U6.B1 U6.B2 U6.B3 U6.B4 U6.B5 U6.B6 U6.B7 U6.B8 U6.B9 U6.B10 U6.B11 U6.B12 U6.C1 U6.C2 U6.C3 U6.C4 U6.C5 U6.C6 U6.C7 U6.C8 U6.C9 U6.C10 U6.C11 U6.C12 U6.D1 U6.D2 U6.D3 U6.D4 U6.D5 U6.D6 U6.D7 U6.D9 U6.D10 U6.D11 U6.D12 U6.E1 U6.E2 U6.E3 U6.E4 U6.E5 U6.E9 U6.E10 U6.E11 U6.E12 U6.F1 U6.F2 U6.F3 U6.F4 U6.F5 U6.F9 U6.F10 U6.F11 U6.F12 U6.G1 U6.G2 U6.G3 U6.G4 U6.G8 U6.G9 U6.G10 U6.G11 U6.G12 U6.H1 U6.H2 U6.H3 U6.H4 U6.H8 U6.H9 U6.H10 U6.H11 U6.H12 U6.J1 U6.J3 U6.J4 U6.J5 U6.J6 U6.J7 U6.J8 U6.J9 U6.J10 U6.J11 U6.J12 U6.K4 U6.K5 U6.K6 U6.K7 U6.K8 U6.K9 U6.K10 U6.K11 U6.K12 U6.L1 U6.L2 U6.L4 U6.L6 U6.L7 U6.L8 U6.L9 U6.L10 U6.L12 U6.M1 U6.M2 U6.M3 U6.M4 U6.M5 U6.M6 U6.M9 U6.M11 U6.M12 U7.3 U7.6 U7.9 U7.10 U7.13 U7.14 U7.15 U7.16 U7.19 U7.20 U7.21 U7.22 U7.23 U7.24

## Polygon pours and split planes (outlines as drawn)
MVDD on L3 "MVDD" (solid, remove dead copper, shelved, pour order 13): 99.338,61.038 101.775,58.6 128.65,58.6 128.65,75.4 103.375,75.4 100,72.025 100,63.535 99.338,62.825
VAUX on L3 "VAUX" (solid, remove dead copper, shelved, pour order 15): 92.5,71 92.5,63 100,63 100,71
VINT on L3 "VINT" (solid, remove dead copper, shelved, pour order 14): 95,69.5 95,64.5 98,64.5 98,69.5 95,69.5
+3V3 on L3 "VDD2" (solid, remove dead copper, shelved, pour order 17): 89,59.5 92.5,63 100,63 103.5,59.5
VDD3 on L3 "VDD3" (solid, remove dead copper, shelved, pour order 18): 89,59.5 89,74.5 92.5,71 92.5,63 89,59.5
VDD0 on L3 "VDD0" (solid, remove dead copper, shelved, pour order 19): 89,74.5 92.5,71 100,71 103.5,74.5
GND on L2 "GND" (solid, remove dead copper, shelved, pour order 16): 85,81 85,56 129,56 129,81 85,81

## Keep-outs
L1:
  lines w0.254: 104.8,66.5 105.375,65.925 113.125,65.925 ; 105,61.1 105.8,60.3 116.9,60.3 118.2,61.6 118.2,62.25 116.35,64.1 ; 105,68 111.9,68 ; 105.4,62 114.7,62 115.1,61.6 116.4,61.6 ; 112.775,67.325 113.85,67.325